# Altium PCB DMD_Card.PcbDoc
Units mil, origin at the board's own origin, x right, y up, seen from the top; angles counter-clockwise.
Board outline 16100 x 8800 mil, 2 copper layers (Top Layer, Bottom Layer); 56 components, 78 nets, 390 pads, 0 vias.
Unrouted connection lines stored in the file: 214.
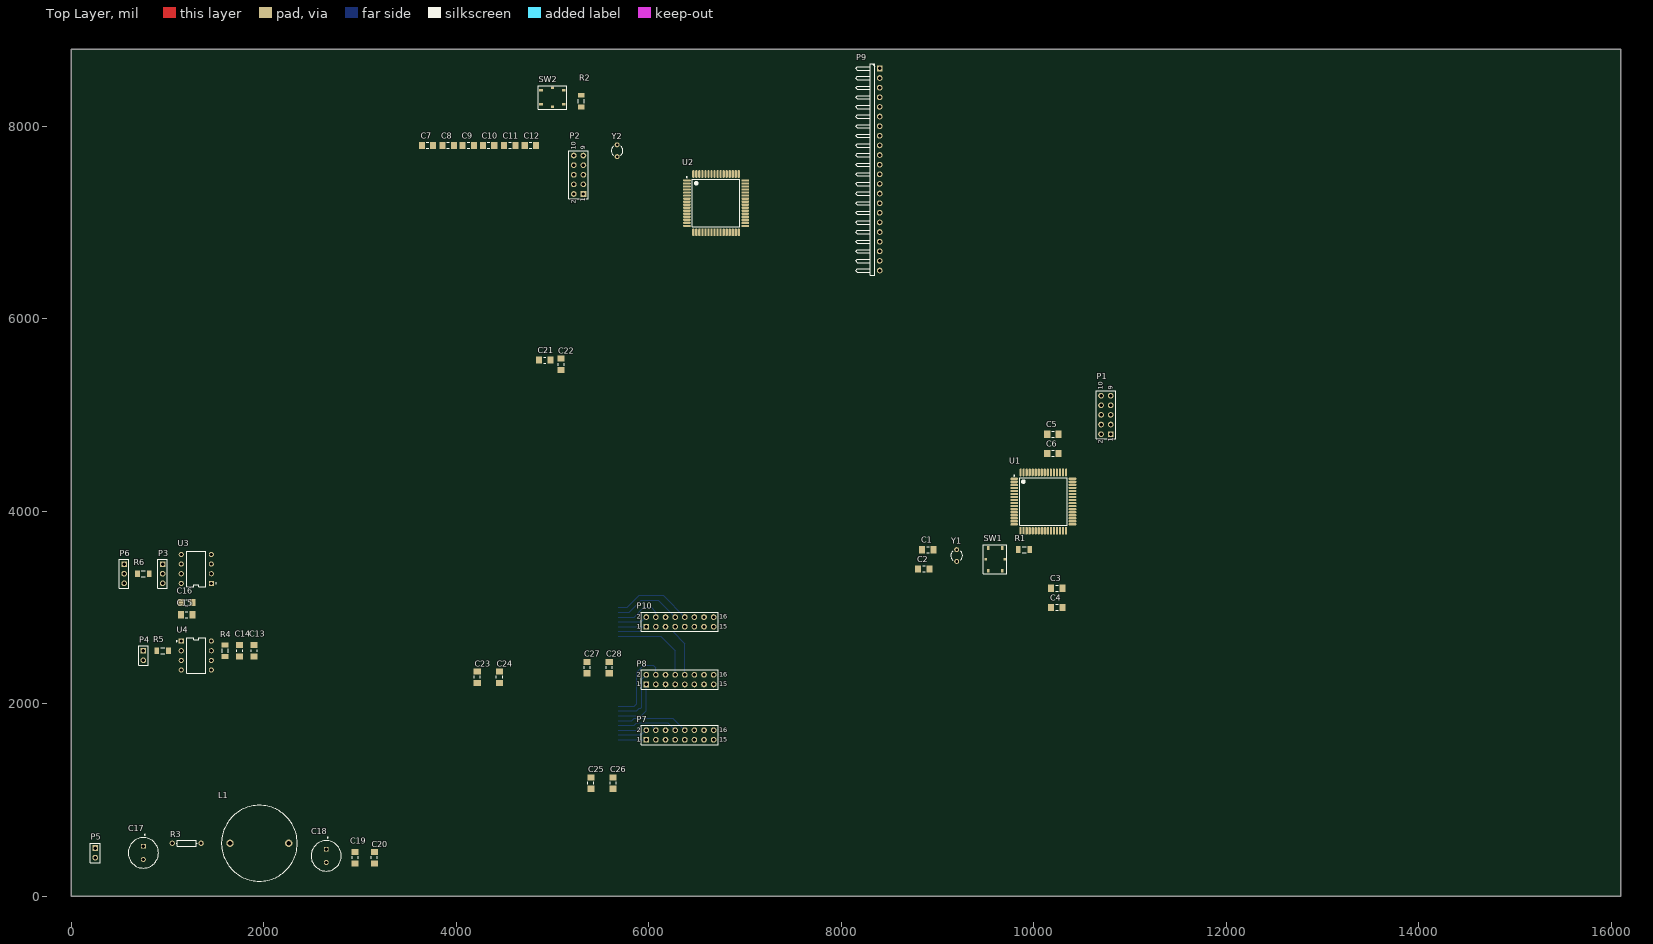
[diagram p0: Top Layer view]
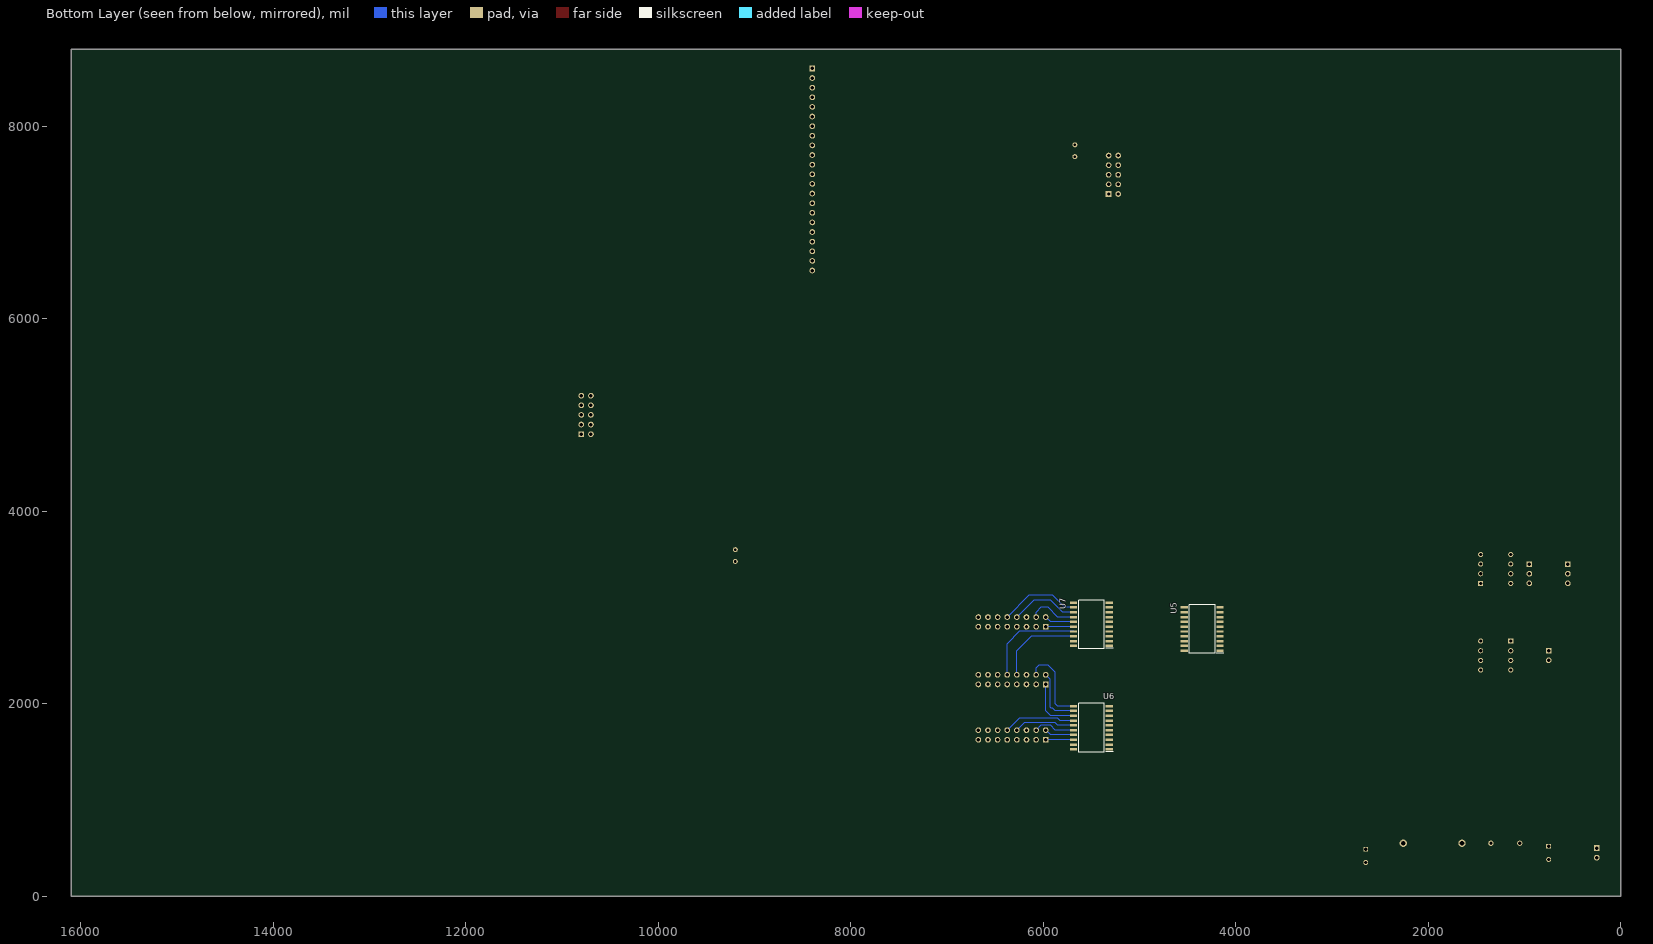
[diagram p1: Bottom Layer view, seen from below]

## Layer stack, top to bottom
Top Solder: solder mask 0.4, Solder Resist, Dk 3.5
Top Layer: signal copper 1.4
Dielectric 1: dielectric 12.6, FR-4, Dk 4.8
Bottom Layer: signal copper 1.4
Bottom Solder: solder mask 0.4, Solder Resist, Dk 3.5

## Board outline
0,0 0,8800 16100,8800 16100,0

## Design rules (kind name [scope] priority, off if disabled: settings)
Clearance [All] p1: gap=10 ignorepadtopadclearanceinfootprint=FALSE except(0: Arc-Hole Track-Hole SMDPad-Hole THPad-Hole Via-Hole Fill-Hole Poly-Hole Region-Hole Text-Hole)
PolygonConnect [All] p1: connectstyle=Relief reliefconductorwidth=10 reliefentries=4 polygonreliefangle="90 Angle" airgapwidth=10
RoutingVias [All] p1: holewidth=28 width=50 viastyle="Through Hole" minholewidth=28 minwidth=50 maxholewidth=28 maxwidth=50
SolderMaskExpansion [All] p1: expansion=4 istentingtop=FALSE
Width [All] p1: maxlimit=10 minlimit=10 preferedwidth=10
30 further rules are at their usual default settings.

## Classes and differential pairs
component class DMD_Controller_Card_Modules: C13 C14 C15 C16 C17 C18 C19 C20 C21 C22 C23 C24 C25 C26 C27 C28 L1 P3 P4 P5 P6 P7 P8 P9 P10 R3 R4 R5 R6 U3 U4 U5 U6 U7
component class DMD_Controller_Card_Microcontroller: C1 C2 C3 C4 C5 C6 C7 C8 C9 C10 C11 C12 P1 P2 R1 R2 SW1 SW2 U1 U2 Y1 Y2

## Components (designator, comment, footprint, x,y, rotation, side; value= is the part's Value field where it differs from the comment)
C1 "22pF" Yageo_CC1206-1.25_IPC_A 8900,3600 r0 top
C2 "22pF" Yageo_CC1206-1.25_IPC_A 8859.07,3400 r0 top
C3 "10uF" Yageo_CC1206-1.25_IPC_A 10240.93,3200 r0 top
C4 "100nF" Yageo_CC1206-1.25_IPC_A 10240.93,3000 r0 top
C5 "10uF" Yageo_CC1206-1.25_IPC_A 10200,4800 r0 top
C6 "100nF" Yageo_CC1206-1.25_IPC_A 10200,4600 r0 top
C7 "22pF" Yageo_CC1206-1.25_IPC_A 3701.85,7800 r0 top
C8 "22pF" Yageo_CC1206-1.25_IPC_A 3916.85,7800 r0 top
C9 "10uF" Yageo_CC1206-1.25_IPC_A 4126.85,7800 r0 top
C10 "100nF" Yageo_CC1206-1.25_IPC_A 4336.85,7800 r0 top
C11 "10uF" Yageo_CC1206-1.25_IPC_A 4556.85,7800 r0 top
C12 "100nF" Yageo_CC1206-1.25_IPC_A 4771.85,7800 r0 top
C13 "10uF" Yageo_CC1206-1.25_IPC_A 1900,2550 r90 top
C14 "100nF" Yageo_CC1206-1.25_IPC_A 1750,2550 r90 top
C15 "10uF" Yageo_CC1206-1.25_IPC_A 1200,2925 r180 top
C16 "100nF" Yageo_CC1206-1.25_IPC_A 1200,3050 r180 top
C17 "100uF 25V" CAPPRD350W60D850H1250 750,450 r270 top
C18 "100uF 25V" CAPPRD350W60D850H1250 2650,418.9 r270 top
C19 "10uF" Yageo_CC1206-1.25_IPC_A 2950,400 r90 top
C20 "100nF" Yageo_CC1206-1.25_IPC_A 3150,400 r90 top
C21 "10uF" Yageo_CC1206-1.25_IPC_A 4920,5570 r0 top
C22 "100nF" Yageo_CC1206-1.25_IPC_A 5090,5525 r90 top
C23 "10uF" Yageo_CC1206-1.25_IPC_A 4220,2275 r90 top
C24 "100nF" Yageo_CC1206-1.25_IPC_A 4450,2275 r90 top
C25 "10uF" Yageo_CC1206-1.25_IPC_A 5400,1175 r90 top
C26 "100nF" Yageo_CC1206-1.25_IPC_A 5630,1175 r90 top
C27 "10uF" Yageo_CC1206-1.25_IPC_A 5360,2375 r90 top
C28 "100nF" Yageo_CC1206-1.25_IPC_A 5590,2375 r90 top
L1 "50uH" LPV2023500KL 1650,550 r0 top
P1 "Header 5X2" HDR2X5 10800,4800 r90 top
P2 "Header 5X2" HDR2X5 5321.85,7295 r90 top
P3 "Header 3" HDR1X3 950,3450 r270 top
P4 "Header 2" HDR1X2 750,2550 r270 top
P5 "Header 2" HDR1X2 250,500 r270 top
P6 "Header 3" HDR1X3 550,3450 r270 top
P7 "Header 8X2" HDR2X8 5975,1625 r0 top
P8 "Header 8X2" HDR2X8 5975,2200 r0 top
P9 "Header 22H" HDR1X22H 8400,8600 r270 top
P10 "Header 8X2" HDR2X8 5975,2800 r0 top
R1 "10K" Yageo_RT1206_IPC_A 9900,3600 r0 top
R2 "10K" Yageo_RT1206_IPC_A 5300,8260.12 r90 top
R3 "Res1" AXIAL-0.3 1200,550 r0 top value=0.47R/2w
R4 "100R" Yageo_RT1206_IPC_A 1600,2550 r90 top
R5 "100R" Yageo_RT1206_IPC_A 950,2550 r0 top
R6 "10K" Yageo_RT1206_IPC_A 750,3350 r180 top
SW1 "Push Button" "Tactile Switch SPST" 9600,3500 r90 top
SW2 "Push Button" "Tactile Switch SPST" 5000,8300 r0 top
U1 "ATMEGA128-16AUR" 64-TQFP 10100,4100 r0 top
U2 "ATMEGA128-16AUR" 64-TQFP 6700,7200 r0 top
U3 "MAX487CPA+" DIP_08 1300,3400 r180 top
U4 "IC_Vishay_6N137_eec" DIP_08 1300,2500 r0 top
U5 "SN74LS245DW" SOIC127P1030X265-20N 4350,2775 r0 bottom
U6 "SN74LS245DW" SOIC127P1030X265-20N 5500,1750 r0 bottom
U7 "SN74LS245DW" SOIC127P1030X265-20N 5500,2825 r0 bottom
Y1 "XTAL" R38 9200,3538.98 r0 top
Y2 "XTAL" R38 5671.85,7745 r0 top

## Footprints (in the part's own frame and the unit in brackets; to place one, negate y for a bottom-side part, rotate by r counter-clockwise, add the part's x,y. Pads: shape width x height; smd on the part's side, far side on the other; paste and mask are expansions set on the pad)
64-TQFP [mm] "Thin QFP, 64-Leads, Body 14x14mm, Pitch 0.8mm, IPC Low Density"
  oval 2.05x0.6 smd: 1(-7.7,6) 2(-7.7,5.2) 3(-7.7,4.4) 4(-7.7,3.6) 5(-7.7,2.8) 6(-7.7,2) 7(-7.7,1.2) 8(-7.7,0.4) 9(-7.7,-0.4) 10(-7.7,-1.2) 11(-7.7,-2) 12(-7.7,-2.8) 13(-7.7,-3.6) 14(-7.7,-4.4) 15(-7.7,-5.2) 16(-7.7,-6) 33(7.7,-6) 34(7.7,-5.2) 35(7.7,-4.4) 36(7.7,-3.6) 37(7.7,-2.8) 38(7.7,-2) 39(7.7,-1.2) 40(7.7,-0.4) 41(7.7,0.4) 42(7.7,1.2) 43(7.7,2) 44(7.7,2.8) 45(7.7,3.6) 46(7.7,4.4) 47(7.7,5.2) 48(7.7,6)
  oval 0.6x2.05 smd: 17(-6,-7.7) 18(-5.2,-7.7) 19(-4.4,-7.7) 20(-3.6,-7.7) 21(-2.8,-7.7) 22(-2,-7.7) 23(-1.2,-7.7) 24(-0.4,-7.7) 25(0.4,-7.7) 26(1.2,-7.7) 27(2,-7.7) 28(2.8,-7.7) 29(3.6,-7.7) 30(4.4,-7.7) 31(5.2,-7.7) 32(6,-7.7) 49(6,7.7) 50(5.2,7.7) 51(4.4,7.7) 52(3.6,7.7) 53(2.8,7.7) 54(2,7.7) 55(1.2,7.7) 56(0.4,7.7) 57(-0.4,7.7) 58(-1.2,7.7) 59(-2,7.7) 60(-2.8,7.7) 61(-3.6,7.7) 62(-4.4,7.7) 63(-5.2,7.7) 64(-6,7.7)
  silkscreen extent -7.82,-6.25 6.25,6.97, body extent -7.99,-8 8.01,8, height 1.12
AXIAL-0.3 [mm] "Axial Device, Thru-Hole; 2 Leads; 0.3 in Pin Spacing"
  round 1.4 hole 0.85: 1(-3.81,0) 2(3.81,0)
  silkscreen extent -2.77,-0.76 2.77,0.76
CAPPRD350W60D850H1250 [mm]
  rect 1.28x1.28 hole 0.85: 1(-1.75,0)
  round 1.28 hole 0.85: 2(1.75,0)
  silkscreen extent -4.9,-4 4,4
DIP_08 [mm]
  rect 1.35x1.35 hole 0.85 paste-1000 mask+0: 1(-3.97,3.81)
  round 1.35 hole 0.85 paste-1000 mask+0: 2(-3.97,1.27) 3(-3.97,-1.27) 4(-3.97,-3.81) 5(3.97,-3.81) 6(3.97,-1.27) 7(3.97,1.27) 8(3.97,3.81)
  silkscreen extent -5.33,-4.69 2.49,4.69, body extent -5.08,-5.08 5.08,5.08, height 8.17
HDR1X2 [mm] "Connector; Header; 2 Position"
  rect 1.5x1.5 hole 0.9: 1(0,0)
  round 1.5 hole 0.9: 2(2.54,0)
  silkscreen extent -1.27,-1.27 3.81,1.27
HDR1X3 [mm] "Connector; Header; 3 Position"
  rect 1.5x1.5 hole 0.9: 1(0,0)
  round 1.5 hole 0.9: 2(2.54,0) 3(5.08,0)
  silkscreen extent -1.27,-1.27 6.35,1.27
HDR1X22H [mm] "Connector; Header; 22 Position; Right Angle"
  rect 1.5x1.5 hole 0.9: 1(0,0)
  round 1.5 hole 0.9: 2(2.54,0) 3(5.08,0) 4(7.62,0) 5(10.16,0) 6(12.7,0) 7(15.24,0) 8(17.78,0) 9(20.32,0) 10(22.86,0) 11(25.4,0) 12(27.94,0) 13(30.48,0) 14(33.02,0) 15(35.56,0) 16(38.1,0) 17(40.64,0) 18(43.18,0) 19(45.72,0) 20(48.26,0) 21(50.8,0) 22(53.34,0)
  silkscreen extent -1.27,-6.35 54.61,-1.27
HDR2X5 [mm] "Connector; Header; 5x2 Position"
  rect 1.5x1.5 hole 0.9: 1(0,0)
  round 1.5 hole 0.9: 2(0,2.54) 3(2.54,0) 4(2.54,2.54) 5(5.08,0) 6(5.08,2.54) 7(7.62,0) 8(7.62,2.54) 9(10.16,0) 10(10.16,2.54)
  silkscreen extent -1.27,-1.27 11.43,3.81
HDR2X8 [mm] "Connector; Header; 8x2 Position"
  rect 1.5x1.5 hole 0.9: 1(0,0)
  round 1.5 hole 0.9: 2(0,2.54) 3(2.54,0) 4(2.54,2.54) 5(5.08,0) 6(5.08,2.54) 7(7.62,0) 8(7.62,2.54) 9(10.16,0) 10(10.16,2.54) 11(12.7,0) 12(12.7,2.54) 13(15.24,0) 14(15.24,2.54) 15(17.78,0) 16(17.78,2.54)
  silkscreen extent -1.27,-1.27 19.05,3.81
LPV2023500KL [mm]
  round 1.95 hole 1.3: 1(0,0) 2(15.5,0)
  silkscreen extent -2.25,-10 17.75,10, body extent -2.25,-10 17.75,10, height 23.1
R38 [mm] "Crystal, Thru-Hole; 2 Leads; Body 3.1 x 8.2 mm (Dia.xH)"
  round 1.3 hole 0.7: 1(0,1.55) 2(0,-1.55)
  silkscreen extent -1.55,-1.19 1.55,1.17
SOIC127P1030X265-20N [mm]
  rect 1.95x0.65 smd: 1(-4.725,5.715) 2(-4.725,4.445) 3(-4.725,3.175) 4(-4.725,1.905) 5(-4.725,0.635) 6(-4.725,-0.635) 7(-4.725,-1.905) 8(-4.725,-3.175) 9(-4.725,-4.445) 10(-4.725,-5.715) 11(4.725,-5.715) 12(4.725,-4.445) 13(4.725,-3.175) 14(4.725,-1.905) 15(4.725,-0.635) 16(4.725,0.635) 17(4.725,1.905) 18(4.725,3.175) 19(4.725,4.445) 20(4.725,5.715)
  silkscreen extent -5.7,-6.4 3.4,6.4, body extent -5.15,-6.4 5.15,6.4, height 2.65
"Tactile Switch SPST" [mm]
  rect 1x0.7 smd: 1(-3,1.85) 2(3,1.85) 3(-3,-1.85) 4(3,-1.85)
  rect 0.7x0.6 smd: 5(0,-2.5) 6(0,2.5)
  silkscreen extent -3.8,-3.1 3.8,3.1, body extent -3.2,-2.6 3.2,2.6, height 1.51
Yageo_CC1206-1.25_IPC_A [mil]
  rect 63.13x75.05 smd paste+0 mask+0: 1(-59.07,0) 2(59.07,0)
  silkscreen extent -13,-31 13,31, body extent -110,-57 110,57, height 10
Yageo_RT1206_IPC_A [mil]
  rect 49.53x71.34 smd paste+0 mask+0: 1(-60.12,0) 2(60.12,0)
  silkscreen extent -21,-31 21,31, body extent -105,-56 105,55, height 10

## Part data
C1 C2 C7 C8: library part CC1206JRNP09BN220, "CAP 22pF 50V ±5% 1206 (3216 Metric) Thickness 0.75mm SMD", Case-EIA=1206, Case-Metric=3216, Rated Voltage="50 V", Tolerance=Â±5%, Max Thickness="0.75 mm", PartNumber=CC1206JRNP09BN220, Technology=SMT
C3 C5 C9 C11 C13 C15 C19 C21 C23 C25 C27: library part CC1206KRX7R7BB334
C4 C6 C10 C12 C14 C16 C20 C22 C24 C26 C28: library part CC1206KRX7R7BB104
C17 C18: "Cap Aluminum Lytic 100uF 25V 20% (8 X 11.5mm) Radial 5mm 500mA 2000h 125C Ammo Pack", Capacitance=100uF, Case/Package=Radial, ESR (Equivalent Series Resistance)=130mR, Manufacturer=Panasonic, Manufacturer Part Number=EEU-TA1E101B, Max Operating Temperature=125°C, Min Operating Temperature=-40°C, Package Quantity=1000, Ripple Current=500mA, Supplier Part Number 1=EEU-TA1E101B-ND, Tolerance=20%, Voltage Rating=25V, Category="Aluminum Electrolytic Capacitors", ComponentLink1Description=https://datasheet.ciiva.com/11679/aba0000ce28-11679757.pdf?src-supplier=Avnet, ComponentLink1URL=https://datasheet.ciiva.com/11679/aba0000ce28-11679757.pdf?src-supplier=Avnet, ComponentLink2Description=https://datasheet.ciiva.com/24063/aba0000ce28-373228-24063900.pdf?src-supplier=Mouser, ComponentLink2URL=https://datasheet.ciiva.com/24063/aba0000ce28-373228-24063900.pdf?src-supplier=Mouser, Construction=RADIAL, Diameter=8mm, Features="General Purpose", Height=11.5mm, Height - Seated (Max)=0.492inch, Impedance=130mR, Lead Diameter=0.6mm, Lead Pitch=5mm, Length=11.5mm, Life (Hours)=2000Hour, Mount="Through Hole", Packaging="Tape and Reel", Pricing 1="1000=0.27214 (USD)", Radiation Hardening=No, RoHS=Yes, RoHS Compliant=Yes, Series=TA, Supplier 1=Digi-Key, Termination=Radial, Voltage Rating (DC)=25V
L1: library part LPV2023-500KL, "Inductor", Manufacturer_Name=Bourns, Mouser Part Number=652-LPV2023-500KL, Datasheet Link=https://www.bourns.com/docs/Product-Datasheets/lpv.pdf, Height=23mm, Manufacturer_Part_Number=LPV2023-500KL, Mouser Price/Stock=https://www.mouser.co.uk/ProductDetail/Bourns/LPV2023-500KL?qs=3eVyCPG4fwlG7E5V0TyKEg%3D%3D
P1 P2: "Header, 5-Pin, Dual row", LatestRevisionDate=17-Jul-2002, LatestRevisionNote="Re-released for DXP Platform.", Publisher="Altium Limited"
P3 P6: "Header, 3-Pin", LatestRevisionDate=17-Jul-2002, LatestRevisionNote="Re-released for DXP Platform.", Publisher="Altium Limited"
P4 P5: "Header, 2-Pin", LatestRevisionDate=17-Jul-2002, LatestRevisionNote="Re-released for DXP Platform.", Publisher="Altium Limited"
P7 P8 P10: "Header, 8-Pin, Dual row", LatestRevisionDate=17-Jul-2002, LatestRevisionNote="Re-released for DXP Platform.", Publisher="Altium Limited"
P9: "Header, 22-Pin, Right Angle", LatestRevisionDate=17-Jul-2002, LatestRevisionNote="Re-released for DXP Platform.", Publisher="Altium Limited"
R1 R2 R6: library part RT1206BRD0710KL
R3: "Resistor", LatestRevisionDate=17-Jul-2002, LatestRevisionNote="Re-released for DXP Platform.", PackageDescription="Axial Device, Thru-Hole; 2 Leads; 0.3 in Pin Spacing", PackageReference=AXIAL-0.3, Published=8-Jun-2000, Publisher="Altium Limited"
R4 R5: library part RT1206BRD07100RL
SW1 SW2: library part PTS526SKG15SMTR2LFS, "Switch Tactile N.O. SPST Round Button Gull Wing 0.05A 12VDC 200000Cycles 2.45N SMD T/R", Manufacturer="ITT C&K", Supplier Part Number 1=CKN12223-1-ND, Category="Tactile Switches", Manufacturer Part Number=PTS526SKG15SMTR2LFS, Pricing 1="1=0.13000, 10=0.12100, 25=0.11480, 100=0.10430, 250=0.09808, 500=0.08972, 1000=0.07511 (USD)", RoHS=No, Stock 1=7554, Supplier 1=Digi-Key
U1 U2: "8-bit AVR Microcontroller, 4.5-5.5V, 128KB Flash, 4KB EEPROM, 4KB SRAM, 64-pin TQFP, Industrial Grade (-40°C to 85°C), Reel", Code_JEDEC=MS-026-AEB, ComponentLink1Description="Manufacturer URL", ComponentLink1URL=http://www.atmel.com/, ComponentLink2Description="ATmega128(L) Datasheet", ComponentLink2URL=http://www.atmel.com/dyn/resources/prod_documents/doc2467.pdf, ComponentLink3Description="ATmega128(L) Summary", ComponentLink3URL=http://www.atmel.com/dyn/resources/prod_documents/2467S.pdf, DatasheetVersion="revX, Jun-2011", PackageDescription="64-Pin Plastic Thin Profile Quad Flat Pack, 14 x 14 x 1.0 mm Body, 0.8 mm Pitch (TQFP)", PackageReference=64A, PackageVersion="revC, Oct-2010", PartNumber=ATMEGA128-16AUR
U3: library part MAX487ECPA+, "Interface IC RS422/485 DIL-8, MAX487ECPA+, Maxim", Case/Package=DIP, Manufacturer=Maxim, Max Operating Temperature=70°C, Max Power Dissipation=727mW, Max Supply Voltage=5.25V, Min Operating Temperature=0°C, Min Supply Voltage=4.75V, Nominal Supply Current=250uA, Operating Supply Voltage=5V, Output Voltage=3V, Package Quantity=50, Supplier Part Number 1=MAX487ECPA+-ND, Category="Interface ICs", ComponentLink1Description=https://datasheet.ciiva.com/16973/0900766b8078aed8-16973392.pdf?src-supplier=Allied+Electronics, ComponentLink1URL=https://datasheet.ciiva.com/16973/0900766b8078aed8-16973392.pdf?src-supplier=Allied+Electronics, ComponentLink2Description=https://datasheet.ciiva.com/16640/max1487e-max491e-16640614.pdf?src-supplier=Avnet+Europe, ComponentLink2URL=https://datasheet.ciiva.com/16640/max1487e-max491e-16640614.pdf?src-supplier=Avnet+Europe, ComponentLink3Description=https://datasheet.ciiva.com/8075/3976-8075401.pdf?src-supplier=Element14, ComponentLink3URL=https://datasheet.ciiva.com/8075/3976-8075401.pdf?src-supplier=Element14, ComponentLink4Description=https://datasheet.ciiva.com/14430/max1487e-max491e-14430329.pdf?src-supplier=Avnet, ComponentLink4URL=https://datasheet.ciiva.com/14430/max1487e-max491e-14430329.pdf?src-supplier=Avnet, ComponentLink5Description=https://datasheet.ciiva.com/14152/jxmax481e-491e-e-14152719.pdf?src-supplier=Distrelec, ComponentLink5URL=https://datasheet.ciiva.com/14152/jxmax481e-491e-e-14152719.pdf?src-supplier=Distrelec, ComponentLink6Description=https://datasheet.ciiva.com/1713/max1487e-max491e-1713146.pdf?src-supplier=Digi-Key, ComponentLink6URL=https://datasheet.ciiva.com/1713/max1487e-max491e-1713146.pdf?src-supplier=Digi-Key, ComponentLink7Description=https://datasheet.ciiva.com/4785/max1487e-max491e-4785914.pdf?src-supplier=Mouser, ComponentLink7URL=https://datasheet.ciiva.com/4785/max1487e-max491e-4785914.pdf?src-supplier=Mouser, Data Rate=256Kbps, Height=4.45mm, Interface=RS-422,RS-485, Lead Free="Lead Free", Length=9.91mm, Logic Function=Transceiver, Manufacturer Part Number=MAX487ECPA+, Mount="Through Hole", Number of Drivers=1, Number of Pins=8, Number of Receivers=1, Number of Transceivers=1, Number of Transmitters=1, Packaging=Rail/Tube, Pricing 1="1=4.05000, 10=3.63500, 25=3.43680, 100=3.05500 (USD)", Propagation Delay=250ns, Radiation Hardening=No, REACH SVHC="No SVHC", RoHS=Yes, RoHS Compliant=Yes, Series=-, Simplex/Duplex="Half Duplex", Stock 1=285, Supplier 1=Digi-Key, Supply Current=250uA, Width=7.87mm
U4: "IC OPTOISO 5.3KV 1CH OPN DRAIN 8DIP", Digikey Part Number=751-1262-5-ND, Manufacturer=Vishay, Mouser Part Number=782-6N137, Package=DIP8, Part Number=6N137, Temperature="-40°C to +100°C", Temperature Range High=+100°C, Temperature Range Low=-40°C, ComponentLink1Description=Upverter, ComponentLink1URL=https://upverter.com/upn/revision/90ff24e5d1aaa85f/, ComponentLink2Description=Datasheet, ComponentLink2URL=http://www.vishay.com/docs/84732/6n137.pdf, Digikey Description="IC OPTOISO 5.3KV 1CH OPN DRAIN 8DIP", helpURL=https://upverter.com/upn/revision/90ff24e5d1aaa85f/, Ipc Land Pattern Name=DIP762W50P254L1016H425Q8, Lead Free=yes, Price=1.00620280459, RoHS=TRUE, Supplier 1=Digi-Key, Supplier 2=Mouser, Supplier Part Number 1=751-1262-5-ND, Supplier Part Number 2=782-6N137
U5 U6 U7: "Integrated Circuit", Manufacturer_Name="Texas Instruments", Mouser Part Number=595-SN74LS245DW, Arrow Part Number=SN74LS245DW, Arrow Price/Stock=https://www.arrow.com/en/products/sn74ls245dw/texas-instruments, Datasheet Link=http://www.ti.com/lit/gpn/sn74ls245, Height=2.65mm, Manufacturer_Part_Number=SN74LS245DW, Mouser Price/Stock=https://www.mouser.co.uk/ProductDetail/Texas-Instruments/SN74LS245DW/?qs=ZA235jQDfbpxKQZqDHbgmw%3D%3D
Y1 Y2: "Crystal Oscillator", LatestRevisionDate=17-Jul-2002, LatestRevisionNote="Re-released for DXP Platform.", PackageDescription="Crystal, Thru-Hole; 2 Leads; Body 3.1 x 8.2 mm (Dia.xH)", PackageReference=R38, Published=8-Jun-2000, Publisher="Altium Limited"

## Nets (pads, with @x,y where several pads share a name; then routed paths per layer and width w, separated by ;. In a path a pad name is that pad's centre, name@x,y a point inside that pad or via, vN(x,y) a via of type N, cw(c..) or ccw(c..) an arc to the next point about the centre after c; other vN are vias at no path point)
A: U5.15 U6.3 U6.8 U7.5
A1: P7.2 U6.17 | length 309.7
  Bottom Layer w10: U6.17 5925,1675 P7.2
A2: P8.2 U6.12 | length 616.6
  Bottom Layer w10: U6.12 5875,1925 5900,1950 5919.14,1950 5930.47,1961.33 5930.47,2255.47 P8.2
A3: P10.2 U7.15 | length 309.7
  Bottom Layer w10: U7.15 5925,2850 P10.2
B: U5.14 U6.4 U6.9 U7.6
B1: P7.4 U6.16 | length 430.4
  Bottom Layer w10: U6.16 5875,1725 5925,1775 6025,1775 P7.4
B2: P8.4 U6.11 | length 840.8
  Bottom Layer w10: U6.11 5850,1975 5875,2000 5875,2325 5950,2400 6050,2400 6075,2375 P8.4
B3: P10.4 U7.14 | length 501.1
  Bottom Layer w10: U7.14 5850,2900 5950,3000 6025,3000 6075,2950 P10.4
CLK: U5.18 U6.5 U7.2 U7.7
CLK1: P7.8 U6.15 | length 630.4
  Bottom Layer w10: U6.15 5850,1775 5875,1800 6200,1800 P7.8
CLK2: P8.8 U7.18 | length 901.1
  Bottom Layer w10: U7.18 6125,2700 6275,2550 P8.8
CLK3: P10.8 U7.13 | length 713.2
  Bottom Layer w10: U7.13 5800,2950 5925,3075 6100,3075 P10.8
ENABLE: U5.16 U6.2 U6.7 U7.4
ENABLE1: P7.1 U6.18 | length 289
  Bottom Layer w10: U6.18 P7.1
ENABLE2: P8.1 U6.13 | length 584.7
  Bottom Layer w10: U6.13 5925,1875 5975,1925 P8.1
ENABLE3: P10.1 U7.16 | length 289
  Bottom Layer w10: U7.16 P10.1
GND: C1.1 C2.1 C3.1 C4.1 C5.1 C6.1 C7.1 C8.1 C9.1 C10.1 C11.1 C12.1 C13.1 C14.1 C15.1 C16.1 C17.2 C18.2 C19.1 C20.1 C21.1 C22.1 C23.1 C24.1 C25.1 C26.1 C27.1 C28.1 P1.10 P2.10 P3.3 P5.2 P6.3 P7.3 P7.5 P7.7 P7.9 P7.11 P7.13 P7.15 P8.3 P8.5 P8.7 P8.9 P8.11 P8.13 P8.15 P9.3 P9.4 P10.3 P10.5 P10.7 P10.9 P10.11 P10.13 P10.15 SW1.1 SW2.1 U1.22 U1.53 U1.63 U2.22 U2.53 U2.63 U3.5 U4.5 U5.10 U5.19 U6.10 U6.19 U7.10 U7.19
MAX487A: P3.1 P6.1 U3.6
MAX487B: P3.2 R6.1 U3.7
NetC17_1: C17.1 P5.1 R3.1
NetL1_1: L1.1 R3.2
NetP4_1: P4.1 R5.1
NetP4_2: P4.2 U4.3
NetP6_2: P6.2 R6.2
NetP9_5: P9.5 U1.51 U2.51
NetP9_6: P9.6 U1.50 U2.50
NetP9_7: P9.7 U1.49 U2.49
NetP9_8: P9.8 U1.48 U2.48
NetP9_9: P9.9 U1.47 U2.47
NetP9_10: P9.10 U1.46 U2.46
NetP9_11: P9.11 U1.45 U2.45
NetP9_12: P9.12 U1.44 U2.44
NetP9_13: P9.13 U1.35 U2.35
NetP9_14: P9.14 U1.36 U2.36
NetP9_15: P9.15 U1.37 U2.37
NetP9_16: P9.16 U1.38 U2.38
NetP9_17: P9.17 U1.39 U2.39
NetP9_18: P9.18 U1.40 U2.40
NetP9_19: P9.19 U1.41 U2.41
NetP9_20: P9.20 U1.42 U2.42
NetP9_21: P9.21 U1.33 U2.33
NetP9_22: P9.22 U1.15 U2.34
NetR4_1: R4.1 U1.27 U4.6
NetR5_2: R5.2 U4.2
NetU1_2: U1.2 U3.1
NetU1_3: U1.3 U3.4
NetU1_4: U1.4 U3.2 U3.3
NetU1_28: U1.28
NetU2_2: U2.2 U5.7
NetU2_3: U2.3 U5.8
NetU2_4: U2.4 U5.9
NetU2_5: U2.5 U5.5
NetU2_6: U2.6 U5.6
NetU2_14: U2.14 U5.2
NetU2_15: U2.15 U5.4
NetU2_16: U2.16 U5.3
R1: P7.12 U5.13
R2: P8.12 U5.12
R3: P10.12 U5.11
RESET1: P1.6 R1.1 SW1.3 U1.20
RESET2: P2.6 R2.1 SW2.3 U2.20
SCLK: U5.17 U6.6 U7.3 U7.8
SCLK1: P7.10 U6.14 | length 751.1
  Bottom Layer w10: U6.14 5825,1825 5850,1850 6250,1850 P7.10
SCLK2: P8.10 U7.17 | length 1065.8
  Bottom Layer w10: U7.17 6250,2750 6375,2625 P8.10
SCLK3: P10.10 U7.12 | length 834
  Bottom Layer w10: U7.12 5775,3000 5900,3125 6150,3125 P10.10
TCK1: P1.1 U1.57
TCK2: P2.1 U2.57
TDI1: P1.9 U1.54
TDI2: P2.9 U2.54
TDO1: P1.3 U1.55
TDO2: P2.3 U2.55
TMS1: P1.5 U1.56
TMS2: P2.5 U2.56
VCC: C3.2 C4.2 C5.2 C6.2 C9.2 C10.2 C11.2 C12.2 C13.2 C14.2 C15.2 C16.2 C18.1 C19.2 C20.2 C21.2 C22.2 C23.2 C24.2 C25.2 C26.2 C27.2 C28.2 L1.2 P1.2 P2.2 P9.1 P9.2 R1.2 R2.2 R4.2 U1.21 U1.52 U2.21 U2.52 U3.8 U4.8 U5.1 U5.20 U6.1 U6.20 U7.1 U7.20
XTAL1: C1.2 U1.24 Y1.1
XTAL2: C2.2 U1.23 Y1.2
XTAL3: C7.2 U2.24 Y2.1
XTAL4: C8.2 U2.23 Y2.2
pads on no net: P1.4 P1.7 P1.8 P2.4 P2.7 P2.8 P7.6 P7.14 P7.16 P8.6 P8.14 P8.16 P10.6 P10.14 P10.16 SW1.2 SW1.4 SW1.5 SW1.6 SW2.2 SW2.4 SW2.5 SW2.6 U1.1 U1.5 U1.6 U1.7 U1.8 U1.9 U1.10 U1.11 U1.12 U1.13 U1.14 U1.16 U1.17 U1.18 U1.19 U1.25 U1.26 U1.29 U1.30 U1.31 U1.32 U1.34 U1.43 U1.58 U1.59 U1.60 U1.61 U1.62 U1.64 U2.1 U2.7 U2.8 U2.9 U2.10 U2.11 U2.12 U2.13 U2.17 U2.18 U2.19 U2.25 U2.26 U2.27 U2.28 U2.29 U2.30 U2.31 U2.32 U2.43 U2.58 U2.59 U2.60 U2.61 U2.62 U2.64 U4.1 U4.4 U4.7 U7.9 U7.11

## Text inside footprints (layer, text, board x,y; h text height)
P1: Top Overlay "10" at 10720,5260 h50 r90; Top Overlay "9" at 10820,5260 h50 r90; Top Overlay "1" at 10820,4720 h50 r90; Top Overlay "2" at 10720,4700 h50 r90
P2: Top Overlay "10" at 5241.85,7755 h50 r90; Top Overlay "9" at 5341.85,7755 h50 r90; Top Overlay "1" at 5341.85,7215 h50 r90; Top Overlay "2" at 5241.85,7195 h50 r90
P7: Top Overlay "2" at 5875,1705 h50; Top Overlay "1" at 5875,1605 h50; Top Overlay "15" at 6735,1605 h50; Top Overlay "16" at 6735,1705 h50
P8: Top Overlay "2" at 5875,2280 h50; Top Overlay "1" at 5875,2180 h50; Top Overlay "15" at 6735,2180 h50; Top Overlay "16" at 6735,2280 h50
P10: Top Overlay "2" at 5875,2880 h50; Top Overlay "1" at 5875,2780 h50; Top Overlay "15" at 6735,2780 h50; Top Overlay "16" at 6735,2880 h50